# EAGLE board Trabajo de Investigacion (EAGLE 9.7.0)

Size 223.53 x 99.41 mm. Coordinates in mm from the lower left corner, seen from the top.
Outline: 0,0 223.53,0 223.53,99.41 0,99.41 0,0
Copper layers (1*16): Top 0.035mm / dielectric 1.5mm / Bottom 0.035mm
Design rules "default": minimum track width 6mil, minimum drill 0.35mm, track to track 6mil, track to pad 6mil, pad to pad 6mil, via to via 6mil, smd to smd 6mil, copper to edge 40mil, drill to drill 6mil, minimum pad ring 10mil, minimum via ring 8mil, stop-mask expansion 4mil, vias tented up to drill 0mil, thermal gap 10mil

## Footprints (pad centres in the part's own frame; a part is rotated, then mirrored left to right if it is on the bottom)
BATTERY-GENERIC = drill 1.118 pad 3.15 octagon: + 2.54,0; - -2.54,0
RESAD1016W63L850D250B = drill 0.83 pad 1.43: 1 -5.08,0; 2 5.08,0
HA-06-SM065 = drill 1 pad 1.676: 1 -2.54,-2.54; 2 0,2.54; 3 2.54,-2.54
DIP826W53P254L959H508Q8B = drill 0.786 pad 1.386: 1 -4.13,3.81; 2 -4.13,1.27; 3 -4.13,-1.27; 4 -4.13,-3.81; 5 4.13,-3.81; 6 4.13,-1.27; 7 4.13,1.27; 8 4.13,3.81
ARDUINO-UNO-R3-SHIELD = drill 1.016 pad 1.88: 3.3V 24.13,-2.54; 5V 24.13,0; A0 24.13,12.7; A1 24.13,15.24; A2 24.13,17.78; A3 24.13,20.32; A4 24.13,22.86; A5 24.13,25.4; AREF -24.13,-13.97; D2 -24.13,20.32; D3 -24.13,17.78; D4 -24.13,15.24; D5 -24.13,12.7; D6 -24.13,10.16; D7 -24.13,7.62; D8 -24.13,3.81; D9 -24.13,1.27; D10 -24.13,-1.27; D11 -24.13,-3.81; D12 -24.13,-6.35; D13 -24.13,-8.89; GND@0 24.13,2.54; GND@1 24.13,5.08; GND@2 -24.13,-11.43; IOREF 24.13,-7.62; NC 24.13,-10.16; RES 24.13,-5.08; RX -24.13,25.4; SCL -24.13,-19.05; SDA -24.13,-16.51; TX -24.13,22.86; VIN 24.13,7.62
LCD-I2C = drill 1.016 long: 1 -19.05,-5.08; 2 -19.05,-7.62; 3 -19.05,-10.16; 4 -19.05,-12.7

## Placement (x,y rotation side)
P1  BATTERYGENERIC  [BATTERY-GENERIC]  8.26,41.35 180 top
R1  1k  [RESAD1016W63L850D250B]  95.69,16.59 0 top
R2  1k  [RESAD1016W63L850D250B]  100.77,8.97 90 top
RPOT1  10k  [HA-06-SM065]  80.45,14.05 0 top
U1  OPAMP_DIP  [DIP826W53P254L959H508Q8B]  127.44,10.24 90 top
U2  ARDUINO-UNO-R3-SHIELD  [ARDUINO-UNO-R3-SHIELD]  89.84,69.56 90 top
U3  LCD-16X2-I2CSUNFOUNDER-IIC  [LCD-I2C]  167.91,80.01 0 top

## Library data of the parts
P1 R1 R2 RPOT1 U1-U3 = Tinkercad

## Nets
P1+: P1.+ RPOT1.3 U1.7
P1-: P1.- R2.1 RPOT1.1 U1.4 U2.GND@0 U2.GND@1 U2.GND@2 U3.1
R1_1: R1.1 RPOT1.2
U1_+IN: R1.2 R2.2 U1.3
U2_5V: U2.5V U3.2
U2_A0: U1.2 U1.6 U2.A0
U2_A4: U2.A4 U3.3
U2_A5: U2.A5 U3.4

## Tracks (layer width: path | path; a pad name or v marks a point on that pad's centre or on a via)
P1+  (2 unrouted)
P1-  (7 unrouted)
R1_1  (1 unrouted)
U1_+IN  (2 unrouted)
U2_5V  (1 unrouted)
U2_A0  (2 unrouted)
U2_A4  (1 unrouted)
U2_A5  (1 unrouted)